# Altium PCB ayx-32-40.PCBDOC
Units mil, origin at the board's own origin, x right, y up, seen from the top; angles counter-clockwise.
Board outline 2086.61 x 728.35 mil, 2 copper layers (Top Layer, Top, Bottom Layer, Bottom); 34 components, 40 nets, 178 pads, 47 vias.
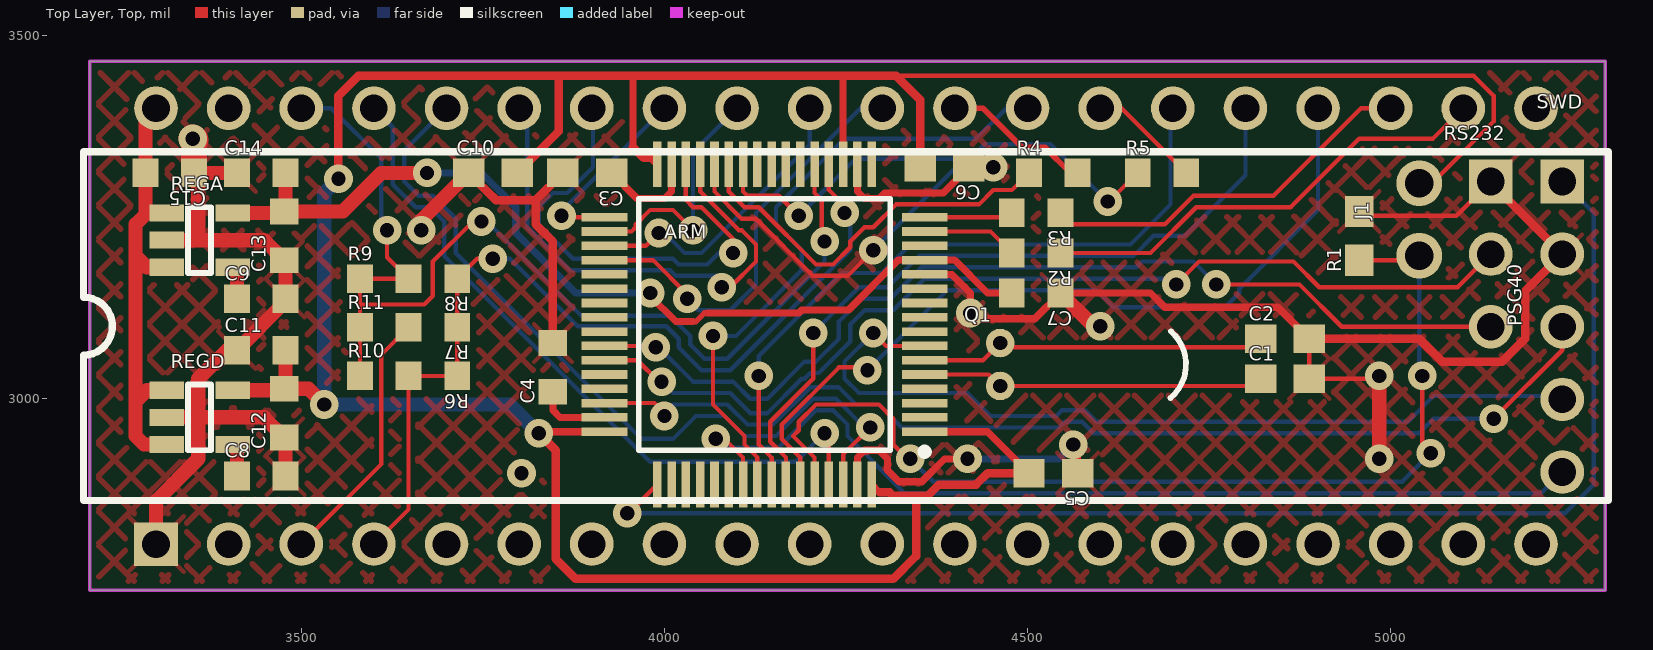
[diagram p0: Top Layer, Top view]
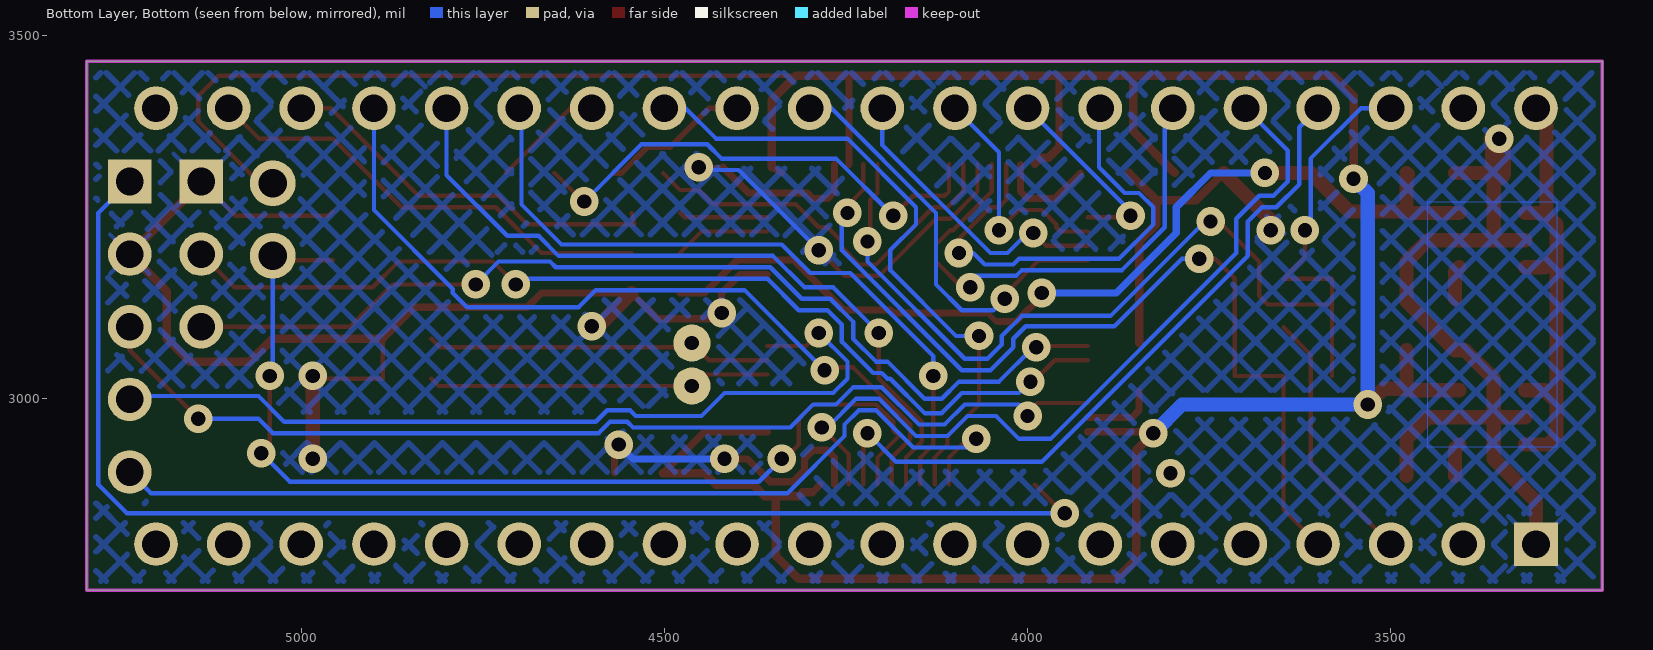
[diagram p1: Bottom Layer, Bottom view, seen from below]

## Layer stack, top to bottom
Top Layer, Top: signal copper 1.4
Dielectric: dielectric 12.6, FR-4, Dk 4.8
Bottom Layer, Bottom: signal copper 1.4

## Board outline
5295.28,3464.57 3208.66,3464.57 3208.66,2736.22 5295.28,2736.22

## Design rules (kind name [scope] priority, off if disabled: settings)
Clearance "Clearance_Top Layer, Top_PadToPad" [ExistsOnLayer('Top Layer, Top') And IsPad vs ExistsOnLayer('Top Layer, Top') And IsPad] p1: gap=6.3
Clearance "Clearance_Top Layer, Top_PadToLine" [ExistsOnLayer('Top Layer, Top') And IsPad vs ExistsOnLayer('Top Layer, Top') And IsWire] p2: gap=8.27
Clearance "Clearance_Top Layer, Top_LineToLine" [ExistsOnLayer('Top Layer, Top') And IsWire vs ExistsOnLayer('Top Layer, Top') And IsWire] p3: gap=6.3
Clearance "Clearance_Top Layer, Top_ViaToPad" [ExistsOnLayer('Top Layer, Top') And IsVia vs ExistsOnLayer('Top Layer, Top') And IsPad] p4: gap=8.27
Clearance "Clearance_Top Layer, Top_ViaToLine" [ExistsOnLayer('Top Layer, Top') And IsVia vs ExistsOnLayer('Top Layer, Top') And IsWire] p5: gap=6.3
Clearance "Clearance_Top Layer, Top_ViaToVia" [ExistsOnLayer('Top Layer, Top') And IsVia vs ExistsOnLayer('Top Layer, Top') And IsVia] p6: gap=6.3
Clearance "Clearance_Bottom Layer, Bottom_PadToPad" [ExistsOnLayer('Bottom Layer, Bottom') And IsPad vs ExistsOnLayer('Bottom Layer, Bottom') And IsPad] p7: gap=6.3
Clearance "Clearance_Bottom Layer, Bottom_PadToLine" [ExistsOnLayer('Bottom Layer, Bottom') And IsPad vs ExistsOnLayer('Bottom Layer, Bottom') And IsWire] p8: gap=8.27
Clearance "Clearance_Bottom Layer, Bottom_LineToLine" [ExistsOnLayer('Bottom Layer, Bottom') And IsWire vs ExistsOnLayer('Bottom Layer, Bottom') And IsWire] p9: gap=6.3
Clearance "Clearance_Bottom Layer, Bottom_ViaToPad" [ExistsOnLayer('Bottom Layer, Bottom') And IsVia vs ExistsOnLayer('Bottom Layer, Bottom') And IsPad] p10: gap=8.27
Clearance "Clearance_Bottom Layer, Bottom_ViaToLine" [ExistsOnLayer('Bottom Layer, Bottom') And IsVia vs ExistsOnLayer('Bottom Layer, Bottom') And IsWire] p11: gap=6.3
Clearance "Clearance_Bottom Layer, Bottom_ViaToVia" [ExistsOnLayer('Bottom Layer, Bottom') And IsVia vs ExistsOnLayer('Bottom Layer, Bottom') And IsVia] p12: gap=6.3
Clearance Clearance_Design_HoleToHole [(IsVia Or IsThruPin) vs (IsVia Or IsThruPin)] p13: gap=13
Clearance [All] p14: gap=6.3
PlaneClearance [All] p1: clearance=10
PolygonConnect PolygonConnect_4 [IsPolygon And InNet('GND') And OnLayer('Bottom Layer, Bottom') vs IsVia] p1: connectstyle=Direct reliefconductorwidth=15 reliefentries=4 polygonreliefangle="90 Angle"
PolygonConnect PolygonConnect_3 [IsPolygon And InNet('GND') And OnLayer('Bottom Layer, Bottom') vs IsPad] p2: connectstyle=Relief reliefconductorwidth=5.91 reliefentries=4 polygonreliefangle="45 Angle"
PolygonConnect PolygonConnect_2 [IsPolygon And InNet('GND') And OnLayer('Top Layer, Top') vs IsVia] p3: connectstyle=Direct reliefconductorwidth=15 reliefentries=4 polygonreliefangle="90 Angle"
PolygonConnect PolygonConnect_1 [IsPolygon And InNet('GND') And OnLayer('Top Layer, Top') vs IsPad] p4: connectstyle=Relief reliefconductorwidth=5.91 reliefentries=4 polygonreliefangle="45 Angle"
PolygonConnect [All] p5: connectstyle=Relief reliefconductorwidth=10 reliefentries=4 polygonreliefangle="90 Angle"
RoutingVias [All] p1: holewidth=28 width=50 viastyle="Through Hole" minholewidth=28 minwidth=50 maxholewidth=28 maxwidth=50
SilkscreenOverComponentPads [All] p1: minsilkscreentomaskgap=10
SolderMaskExpansion [All] p1: expansion=4
Width [All] p1: maxlimit=10 minlimit=10 preferedwidth=10
26 further rules are at their usual default settings.

## Components (designator, comment, footprint, x,y, rotation, side; value= is the part's Value field where it differs from the comment)
ARM "" LQFP-10X10-64 4137.8,3102.36 r180 top
C1 "10p" SMD-1608-0603#1 4854.33,3027.56 r0 top
C2 "10p" SMD-1608-0603#1 4854.33,3082.68 r0 top
C3 "2u2" SMD-1608-0603#1 3893.7,3311.02 r180 top
C4 "2u2" SMD-1608-0603#2 3846.46,3043.31 r90 top
C5 "10n" SMD-1608-0603#1 4535.43,2897.64 r180 top
C6 "u1" SMD-1608-0603#1 4385.83,3318.9 r180 top
C7 "10n" SMD-1608-0603#2 4511.81,3145.67 r180 top
C8 "10n" SMD-1608-0603#2 3444.88,2893.7 r0 top
C9 "10n" SMD-1608-0603#2 3444.88,3137.8 r0 top
C10 "u1" SMD-1608-0603#1 3763.78,3311.02 r0 top
C11 "10u" SMD-1608-0603#2 3444.88,3066.93 r0 top
C12 "u1" SMD-1608-0603#2 3476.38,2980.32 r90 top
C13 "u1" SMD-1608-0603#2 3476.38,3224.41 r90 top
C14 "10u" SMD-1608-0603#2 3444.88,3311.02 r0 top
C15 "10u" SMD-1608-0603#2 3318.9,3311.02 r180 top
J1 "" JUMPER_JUMPER(Primary) 5039.37,3196.85 r90 top
PSG40 "" DIP40 3300,2800 r90 top
Q1 "16MHz" WATCH-XTAL_CRYSTAL-WATCH(Primary) 4460.63,3047.24 r0 top
R1 "4k7" SMD-1608-0603#1 4956.69,3224.41 r90 top
R2 "510" SMD-1608-0603#2 4511.81,3200.79 r180 top
R3 "510" SMD-1608-0603#2 4511.81,3255.91 r180 top
R4 "510" SMD-1608-0603#2 4535.43,3311.02 r0 top
R5 "510" SMD-1608-0603#2 4685.04,3311.02 r0 top
R6 "0" SMD-1608-0603#2 3681.1,3031.5 r180 top
R7 "0" SMD-1608-0603#2 3681.1,3098.43 r180 top
R8 "0" SMD-1608-0603#2 3681.1,3165.35 r180 top
R9 "0" SMD-1608-0603#2 3614.17,3165.35 r0 top
R10 "0" SMD-1608-0603#2 3614.17,3031.5 r0 top
R11 "0" SMD-1608-0603#2 3614.17,3098.43 r0 top
REGA "3.3V" SOT23-5 3314.96,3255.91 r0 top
REGD "3.3V" SOT23-5 3314.96,3011.81 r0 top
RS232 "" DIP-HEAD-3 5137.8,3299.21 r0 top
SWD "" DIP-HEAD-5 5236.22,3299.21 r0 top

## Footprints (in the part's own frame and the unit in brackets; to place one, negate y for a bottom-side part, rotate by r counter-clockwise, add the part's x,y. Pads: shape width x height; smd on the part's side, far side on the other; paste and mask are expansions set on the pad)
DIP40 [mil]
  rect 60x60 hole 38: 1(0,0)
  round 60 hole 38: 2(0,-100) 3(0,-200) 4(0,-300) 5(0,-400) 6(0,-500) 7(0,-600) 8(0,-700) 9(0,-800) 10(0,-900) 11(0,-1000) 12(0,-1100) 13(0,-1200) 14(0,-1300) 15(0,-1400) 16(0,-1500) 17(0,-1600) 18(0,-1700) 19(0,-1800) 20(0,-1900) 21(600,-1900) 22(600,-1800) 23(600,-1700) 24(600,-1600) 25(600,-1500) 26(600,-1400) 27(600,-1300) 28(600,-1200) 29(600,-1100) 30(600,-1000) 31(600,-900) 32(600,-800) 33(600,-700) 34(600,-600) 35(600,-500) 36(600,-400) 37(600,-300) 38(600,-200) 39(600,-100) 40(600,0)
  silkscreen extent 60,-2000 540,100
DIP-HEAD-3 [mil]
  rect 60x60 hole 38: 1(0,0)
  round 60 hole 38: 2(0,-100) 3(0,-200)
DIP-HEAD-5 [mil]
  rect 60x60 hole 38: 1(0,0)
  round 60 hole 38: 2(0,-100) 3(0,-200) 4(0,-300) 5(0,-400)
JUMPER_JUMPER(Primary) [mm]
  round 1.6 hole 1: 0(0,0) 1(2.54,0)
LQFP-10X10-64 [mm]
  rect 1.6x0.3 smd: 1(-5.6,3.75) 2(-5.6,3.25) 3(-5.6,2.75) 4(-5.6,2.25) 5(-5.6,1.75) 6(-5.6,1.25) 7(-5.6,0.75) 8(-5.6,0.25) 9(-5.6,-0.25) 10(-5.6,-0.75) 11(-5.6,-1.25) 12(-5.6,-1.75) 13(-5.6,-2.25) 14(-5.6,-2.75) 15(-5.6,-3.25) 16(-5.6,-3.75) 33(5.6,-3.75) 34(5.6,-3.25) 35(5.6,-2.75) 36(5.6,-2.25) 37(5.6,-1.75) 38(5.6,-1.25) 39(5.6,-0.75) 40(5.6,-0.25) 41(5.6,0.25) 42(5.6,0.75) 43(5.6,1.25) 44(5.6,1.75) 45(5.6,2.25) 46(5.6,2.75) 47(5.6,3.25) 48(5.6,3.75)
  rect 0.3x1.6 smd: 17(-3.75,-5.6) 18(-3.25,-5.6) 19(-2.75,-5.6) 20(-2.25,-5.6) 21(-1.75,-5.6) 22(-1.25,-5.6) 23(-0.75,-5.6) 24(-0.25,-5.6) 25(0.25,-5.6) 26(0.75,-5.6) 27(1.25,-5.6) 28(1.75,-5.6) 29(2.25,-5.6) 30(2.75,-5.6) 31(3.25,-5.6) 32(3.75,-5.6) 49(3.75,5.6) 50(3.25,5.6) 51(2.75,5.6) 52(2.25,5.6) 53(1.75,5.6) 54(1.25,5.6) 55(0.75,5.6) 56(0.25,5.6) 57(-0.25,5.6) 58(-0.75,5.6) 59(-1.25,5.6) 60(-1.75,5.6) 61(-2.25,5.6) 62(-2.75,5.6) 63(-3.25,5.6) 64(-3.75,5.6)
  silkscreen extent -5.72,-4.4 4.4,4.57
SMD-1608-0603#1 [mm]
  rect 1.1x1 smd: 1(-0.85,0) 2(0.85,0)
SMD-1608-0603#2 [mm]
  rect 0.9x1 smd: 1(-0.85,0) 2(0.85,0)
SOT23-5 [mm]
  rect 1.2x0.6 smd: 1(0,0) 2(0,-0.95) 3(0,-1.9) 4(2.3,-1.9) 5(2.3,0)
  silkscreen extent 0.74,-2.1 1.54,0.2
WATCH-XTAL_CRYSTAL-WATCH(Primary) [mm]
  round 1 / inner round 1.3 / far side round 1.3 hole 0.5: A(0.04,0.75) B(0.04,-0.75)
  silkscreen extent 6,-1.17 6.54,1.16

## Part data
J1: "Program"
Q1: "Crystal"

## Via types
v1: diameter 39.37, hole 19.68, Top Layer, Top to Bottom Layer, Bottom, 47 vias

## Nets (pads, with @x,y where several pads share a name; then routed paths per layer and width w, separated by ;. In a path a pad name is that pad's centre, name@x,y a point inside that pad or via, vN(x,y) a via of type N, cw(c..) or ccw(c..) an arc to the next point about the centre after c; other vN are vias at no path point)
AU_A: ARM.20 PSG40.4 R6.1 R6.2 R7.1 R8.1 R10.2 | length 1274.1
  Top Layer, Top w5.91: PSG40.4 3647.64,2847.64 R10.2 R6.1 R7.1 R8.1 3742.13,3192.91 v1(3763.78,3192.91) ; ARM.20 4226.38,3287.4 4248.03,3265.75 v1(4248.03,3255.91)
  Bottom Layer, Bottom w5.91: v1(3763.78,3192.91) 3787.4,3192.91 3880.51,3099.8 4002.56,3099.8 4019.68,3082.68 4019.68,3070.87 4051.18,3039.37 4090.55,3039.37 4255.91,3204.72 4255.91,3248.03 v1(4248.03,3255.91)
AU_B: PSG40.3 R7.2 R11.2 | length 359.6
  Top Layer, Top w5.91: PSG40.3 3610.24,2910.24 3610.24,3061.02 R11.2
AU_C: ARM.21 PSG40.38 R8.2 R9.1 R9.2 R10.1 R11.1 | length 1515.5
  Top Layer, Top w5.91: R10.1 R11.1 3580.71,3129.92 ; v1(3618.11,3232.28) 3618.11,3194.88 R9.2 R9.1 3580.71,3129.92 ; v1(3748.03,3244.09) 3736.22,3244.09 3681.1,3188.98 3681.1,3141.73 3669.29,3129.92 3580.71,3129.92 ; ARM.21 4206.69,3283.46 4216.54,3273.62 4216.54,3220.47 v1(4220.47,3216.54)
  Bottom Layer, Bottom w5.91: PSG40.38 3540.94,3400 3610.24,3330.71 3610.24,3240.16 v1(3618.11,3232.28) ; v1(3748.03,3244.09) 3755.91,3244.09 3885.83,3114.17 4007.87,3114.17 4035.43,3086.61 4035.43,3074.8 4055.12,3055.12 4086.61,3055.12 4220.47,3188.98 v1(4220.47,3216.54)
AY_A8: ARM.58 PSG40.25 | length 1031.2
  Top Layer, Top w5.91: ARM.58 4167.32,2919.29 4145.67,2940.94 4145.67,2968.5 4204.72,3027.56 v1(4204.72,3090.55) ; PSG40.25 4809.45,3400 PSG40.25@4811.02,3401.57
  Bottom Layer, Bottom w5.91: v1(4204.72,3090.55) 4267.72,3153.54 4307.09,3153.54 4350.39,3196.85 4645.67,3196.85 4673.23,3224.41 4716.54,3224.41 4800,3307.87 PSG40.25
AY_BC1: PSG40.29 R4.2 | length 206.5
  Top Layer, Top w5.91: PSG40.29@4400,3399.21 PSG40.29
  Top Layer, Top w7.87: PSG40.29 4438.58,3400 4492.13,3346.46 4523.62,3346.46 4559.06,3311.02 R4.2
AY_BC2: ARM.56 PSG40.28 | length 893.7
  Top Layer, Top w5.91: v1(4066.93,3086.61) 4066.93,2992.13 4110.24,2948.82 4110.24,2937.01 4127.95,2919.29 ARM.56
  Bottom Layer, Bottom w5.91: v1(4066.93,3086.61) 4098.43,3086.61 4188.98,3177.17 4188.98,3204.72 4153.54,3240.16 4153.54,3263.78 4248.03,3358.27 4429.13,3358.27 4470.87,3400 PSG40.28
AY_BDIR: PSG40.27 R5.2 | length 155.4
  Top Layer, Top w5.91: PSG40.27 4629.53,3400 R5.2
AY_CLK: PSG40.22 R2.1 | length 637.2
  Top Layer, Top w5.91: R2.1 4669.29,3200.79 4732.28,3263.78 4862.2,3263.78 4956.69,3358.27 5058.27,3358.27 PSG40.22
GND: ARM.12 ARM.18 ARM.28 ARM.63 C1.2 C2.2 C3.2 C4.2 C5.1 C6.1 C7.1 C8.2 C9.2 C10.1 C11.1 C12.1 C13.1 C14.1 C15.1 PSG40.1 R1.2 REGA.2 REGD.2 RS232.1 SWD.2 | length 4533
  Top Layer, Top w5.91: ARM.28 4068.9,3285.43 4106.3,3248.03 4125.98,3248.03 4204.72,3169.29 4251.97,3169.29 v1(4287.4,3204.72) ; C6.1 v1(4452.76,3318.9) ; v1@4589.76,3110.24 v1(4600,3100) ; C2.2 C1.2 4980.31,3027.56 v1(4984.25,3031.5) ; R1.2 4962.6,3251.97 5090.55,3251.97 RS232.1
  Top Layer, Top w9.84: ARM.63 4265.75,2919.29 4275.59,2929.13 4295.28,2929.13 4307.09,2917.32 4307.09,2901.57 4322.83,2885.83 4354.33,2885.83 4385.83,2917.32 v1(4417.32,2917.32) ; ARM.18 4265.75,3285.43 4275.59,3275.59 4295.28,3275.59 4303.15,3283.46 4383.86,3283.46 C6.1 ; ARM.12 4395.67,3171.26 4421.26,3145.67 v1(4421.26,3118.11) 4429.13,3110.24 4509.84,3110.24 C7.1 4669.29,3145.67 4688.98,3125.98 4844.49,3125.98 C2.2 ; v1(4562.99,2937.01) 4568.9,2931.1 C5.1
  Top Layer, Top w11.81: C10.1 3767.72,3273.62 3822.83,3273.62 ; C4.2 3846.46,3216.54 3822.83,3240.16 3822.83,3273.62 ; C3.2 3822.83,3273.62 ; C2.2 5039.37,3082.68 5070.87,3051.18 5153.54,3051.18 5185.04,3082.68 5185.04,3148.03 SWD.2 5137.8,3297.64 RS232.1
  Top Layer, Top w19.68: PSG40.1 3300,2859.06 3358.27,2917.32 3358.27,2970.47 ; REGD.2 3354.33,2974.41 ; REGA.2 3358.27,3218.5 ; C14.1 C15.1 3358.27,3305.12 3358.27,3218.5 ; C8.2 3478.35,2944.88 C12.1 3448.82,2974.41 3358.27,2974.41 ; v1(3665.35,3232.28) 3665.35,3246.06 C10.1 ; C7.1 4590.94,3100 v1(4600,3100) ; v1(4984.25,2917.32) v1(4984.25,3031.5) ; 3354.33,2974.41 3358.27,2974.41 ; 3354.33,2974.41 3358.27,2970.47 ; 3358.27,2970.47 3358.27,2974.41 ; 3358.27,2974.41 3358.27,3027.56 3397.64,3066.93 C11.1 3478.35,3133.86 C9.2 3478.35,3188.98 C13.1 3448.82,3218.5 3358.27,3218.5
  Top Layer, Top w35.43: C15.1 v1@3352.36,3356.3
  Top Layer, Top w39.37: v1(3350.39,3358.27) v1@3352.36,3356.3
  Bottom Layer, Bottom w5.91: v1(4287.4,3204.72) 4397.64,3314.96 4448.82,3314.96 v1(4452.76,3318.9)
  Bottom Layer, Bottom w9.84: v1(4417.32,2917.32) 4543.31,2917.32 v1(4562.99,2937.01)
NET00000: ARM.31 C3.1 | length 138.8
  Top Layer, Top w9.84: C3.1 3962.6,3275.59 4000,3275.59 4009.84,3285.43 ARM.31
NET00002: ARM.47 C4.1 | length 100.5
  Top Layer, Top w9.84: C4.1 3846.46,2984.25 3856.3,2974.41 ARM.47
NET00003: ARM.60 J1.0 R1.1 | length 1448.6
  Top Layer, Top w5.91: ARM.60 4206.69,2919.29 4177.17,2948.82 4185.04,2956.69 4185.04,2968.5 4208.66,2992.13 4295.28,2992.13 4314.96,2972.44 4314.96,2937.01 4334.65,2917.32 v1(4338.58,2917.32) ; R1.1 5033.46,3190.94 J1.0 J1.0@5055.12,3181.1 ; v1(5043.31,3031.5) 5043.31,2937.01 v1(5055.12,2925.2)
  Bottom Layer, Bottom w5.91: v1(4338.58,2917.32) 4370.08,2885.83 5015.75,2885.83 v1(5055.12,2925.2) ; J1.0 5039.37,3035.43 v1(5043.31,3031.5)
NET00004: ARM.6 C2.1 Q1.A | length 479.7
  Top Layer, Top w5.91: ARM.6 4438.58,3053.15 Q1.A 4468.11,3070.87 4809.06,3070.87 C2.1
NET00005: ARM.5 C1.1 Q1.B | length 473.2
  Top Layer, Top w5.91: ARM.5 4446.46,3033.46 Q1.B 4811.02,3017.72 C1.1
NET00006: ARM.15 R2.2 | length 132.3
  Top Layer, Top w5.91: ARM.15 4448.82,3230.32 R2.2
NET00007: ARM.16 R3.2 | length 122.5
  Top Layer, Top w5.91: ARM.16 4472.44,3250 R3.2
NET00008: ARM.27 R4.1 | length 549.2
  Top Layer, Top w5.91: ARM.27 4088.58,3285.43 4110.24,3263.78 4129.92,3263.78 4208.66,3185.04 4232.28,3185.04 4255.91,3208.66 4255.91,3216.54 4275.59,3236.22 4287.4,3236.22 4318.9,3267.72 4433.07,3267.72 4452.76,3287.4 4478.35,3287.4 R4.1
NET00009: ARM.26 R5.1 | length 684.3
  Top Layer, Top w5.91: ARM.26 4108.27,3285.43 4114.17,3279.53 4157.48,3279.53 v1(4185.04,3251.97) ; v1(4610.24,3271.65) 4612.2,3271.65 R5.1
  Bottom Layer, Bottom w5.91: v1(4185.04,3251.97) 4263.78,3330.71 4421.26,3330.71 4440.94,3350.39 4531.5,3350.39 v1(4610.24,3271.65)
NET00010: C8.1 REGD.4 | length 45.8
  Top Layer, Top w19.68: REGD.4 3411.42,2931.1 C8.1
NET00011: C9.1 REGA.4 | length 45.8
  Top Layer, Top w19.68: REGA.4 3411.42,3175.2 C9.1
SWCLK: ARM.49 SWD.1 | length 1839.9
  Top Layer, Top w5.91: v1(3948.82,2842.52) 3950.79,2842.52 ARM.49
  Bottom Layer, Bottom w5.91: v1(3948.82,2842.52) 5240.16,2842.52 5279.53,2881.89 5279.53,3255.91 SWD.1
SWDIO: ARM.46 SWD.3 | length 1482.2
  Top Layer, Top w5.91: ARM.46 3986.22,2994.09 4000,2980.32 v1(4000,2976.38) ; v1(5141.73,2972.44) 5236.22,3066.93 SWD.3
  Bottom Layer, Bottom w5.91: v1(4000,2976.38) 4000,2980.32 4011.81,2992.13 4086.61,2992.13 4114.17,2964.57 4149.61,2964.57 4200.79,3015.75 4240.16,3015.75 4263.78,2992.13 4295.28,2992.13 4326.77,2960.63 4543.31,2960.63 4551.18,2968.5 4574.8,2968.5 4590.55,2952.76 5039.37,2952.76 5059.06,2972.44 v1(5141.73,2972.44)
SWO: ARM.55 SWD.5 | length 1349.4
  Top Layer, Top w5.91: v1(4070.87,2944.88) 4082.68,2944.88 4108.27,2919.29 ARM.55
  Bottom Layer, Bottom w5.91: v1@4066.93,2944.88 v1(4070.87,2944.88) 4082.68,2933.07 4157.48,2933.07 4208.66,2984.25 4232.28,2984.25 4251.97,2964.57 4251.97,2948.82 4330.71,2870.08 5207.09,2870.08 SWD.5
USART_RX: ARM.43 RS232.2 | length 1419.1
  Top Layer, Top w5.91: ARM.43 3962.6,3053.15 3992.13,3023.62 v1(3996.06,3023.62) ; v1@4700.79,3141.73 v1(4704.72,3157.48) ; v1@4716.54,3157.48 v1(4704.72,3157.48) ; RS232.2 5092.13,3153.54 4901.57,3153.54 4866.14,3188.98 4736.22,3188.98 v1(4704.72,3157.48)
  Bottom Layer, Bottom w5.91: v1(3996.06,3023.62) 4011.81,3007.87 4090.55,3007.87 4118.11,2980.32 4141.73,2980.32 4188.98,3027.56 4192.91,3027.56 4200.79,3035.43 4212.6,3035.43 4255.91,3078.74 4255.91,3102.36 4275.59,3122.05 4314.96,3122.05 4358.27,3165.35 4696.85,3165.35 v1(4704.72,3157.48)
USART_TX: ARM.42 RS232.3 | length 1379.9
  Top Layer, Top w5.91: ARM.42 3986.22,3072.83 v1(3988.19,3070.87) ; v1(4759.84,3157.48) 4874.41,3157.48 4932.68,3099.21 RS232.3
  Bottom Layer, Bottom w5.91: v1(3988.19,3070.87) 3992.13,3070.87 4039.37,3023.62 4094.49,3023.62 4118.11,3000 4141.73,3000 4192.91,3051.18 4208.66,3051.18 4240.16,3082.68 4240.16,3106.3 4271.65,3137.8 4311.02,3137.8 4354.33,3181.1 4649.61,3181.1 4657.48,3188.98 4728.35,3188.98 v1(4759.84,3157.48)
VDD5: C15.2 PSG40.40 REGA.1 REGA.3 REGD.1 REGD.3 | length 640
  Top Layer, Top w19.68: PSG40.40 3285.43,3385.43 C15.2 3285.43,3257.87 3287.4,3255.91 ; REGD.3 3283.46,2937.01 3271.65,2948.82 3271.65,2996.06 ; REGD.1 3287.4,3011.81 3271.65,2996.06 ; REGA.3 3287.4,3181.1 3271.65,3196.85 ; REGA.1 3287.4,3255.91 ; 3271.65,2996.06 3271.65,3196.85 ; 3271.65,3196.85 3271.65,3240.16 3287.4,3255.91
VDD33: ARM.1 ARM.19 ARM.32 ARM.48 ARM.64 C5.2 C6.2 C10.2 C11.2 C12.2 J1.1 REGD.5 | length 4595.6
  Top Layer, Top w5.91: 4303.15,3444.88 4318.9,3444.88 5114.17,3444.88 5141.73,3417.32 5141.73,3381.89 5056.69,3296.85 J1.1
  Top Layer, Top w9.84: v1(3826.77,2952.76) 3828.74,2954.72 ARM.48 ; 3956.69,3346.46 3956.69,3444.88 ; 3981.3,3331.69 ARM.32 ; 4244.09,3444.88 4246.06,3442.91 ARM.19 ; ARM.64 4296.26,2871.06 ; C6.2@4338.58,3311.02 C6.2 ; ARM.1 4444.88,2954.72 C5.2
  Top Layer, Top w11.81: v1(3551.18,3303.15) 3551.18,3417.32 3578.74,3444.88 3854.33,3444.88 ; C10.2 3854.33,3368.11 3854.33,3444.88 ; v1(3826.77,2952.76) 3850.39,2929.13 3850.39,2779.53 3877.95,2751.97 4314.96,2751.97 4346.46,2783.46 4346.46,2866.14 ; 3956.69,3346.46 3971.46,3331.69 3981.3,3331.69 ; 4296.26,2871.06 4310.04,2871.06 4314.96,2866.14 4346.46,2866.14 ; C6.2 4352.36,3411.42 4318.9,3444.88 4303.15,3444.88 4244.09,3444.88 3956.69,3444.88 3854.33,3444.88 ; C5.2 4444.88,2897.64 4429.13,2881.89 4377.95,2881.89 4362.2,2866.14 4346.46,2866.14
  Top Layer, Top w19.68: REGD.5 3474.41,3011.81 C12.2 ; C11.2 3478.35,3015.75 C12.2 ; v1(3531.5,2992.13) 3509.84,3013.78 C12.2
  Bottom Layer, Bottom w19.68: v1(3551.18,3303.15) 3531.5,3283.46 v1(3531.5,2992.13) 3787.4,2992.13 v1(3826.77,2952.76)
VDDA33: ARM.13 C7.2 C13.2 C14.2 REGA.5 | length 1314.1
  Top Layer, Top w7.87: 4039.37,3106.3 4043.31,3106.3 4055.12,3118.11 4059.06,3118.11
  Top Layer, Top w9.84: v1(3980.32,3145.67) 3980.32,3141.73 4015.75,3106.3 4039.37,3106.3 ; 4059.06,3118.11 4185.04,3118.11 4188.98,3122.05 4253,3122.05 4321.9,3190.94 ARM.13 4399.61,3190.94 4444.88,3145.67 C7.2
  Top Layer, Top w19.68: REGA.5 3474.41,3255.91 C13.2 ; C14.2@3476.38,3309.06 C14.2 3478.35,3259.84 C13.2 ; v1(3673.23,3311.02) 3610.24,3311.02 3557.09,3257.87 C13.2
  Bottom Layer, Bottom w9.84: v1(3673.23,3311.02) 3748.03,3311.02 3795.28,3263.78 3795.28,3228.35 3877.95,3145.67 v1(3980.32,3145.67)
Z80_D0: ARM.61 PSG40.37 | length 985.5
  Top Layer, Top w5.91: v1(4220.47,2952.76) 4226.38,2946.85 ARM.61
  Bottom Layer, Bottom w5.91: PSG40.37 3625.98,3374.02 3625.98,3295.28 3657.48,3263.78 3677.17,3263.78 3696.85,3244.09 3696.85,3196.85 3980.32,2913.39 4181.1,2913.39 v1(4220.47,2952.76)
Z80_D1: ARM.62 PSG40.36 | length 1097.3
  Top Layer, Top w5.91: ARM.62 4246.06,2923.23 v1(4283.46,2960.63)
  Bottom Layer, Bottom w5.91: PSG40.36 3641.73,3341.73 3641.73,3299.21 3661.42,3279.53 3681.1,3279.53 3712.6,3248.03 3712.6,3200.79 3968.5,2944.88 4011.81,2944.88 4043.31,2976.38 4082.68,2976.38 4110.24,2948.82 4153.54,2948.82 4204.72,3000 4236.22,3000 4275.59,2960.63 v1(4283.46,2960.63)
Z80_D2: ARM.29 PSG40.35 | length 704.8
  Top Layer, Top w5.91: ARM.29 4049.21,3285.43 4102.36,3232.28 4106.3,3232.28 4125.98,3212.6 4125.98,3188.98 4090.55,3153.54 v1(4078.74,3153.54)
  Bottom Layer, Bottom w5.91: PSG40.35 3811.02,3388.98 3811.02,3236.22 3870.08,3177.17 4007.87,3177.17 4015.75,3169.29 4070.87,3169.29 4078.74,3161.42 v1(4078.74,3153.54)
Z80_D3: ARM.30 PSG40.34 | length 656
  Top Layer, Top w5.91: ARM.30 4029.53,3273.62 4039.37,3263.78 4051.18,3263.78 4094.49,3220.47 v1(4094.49,3200.79)
  Bottom Layer, Bottom w5.91: PSG40.34 3901.57,3398.43 3901.57,3318.9 3866.14,3283.46 3846.46,3283.46 3826.77,3263.78 3826.77,3240.16 3874.02,3192.91 4011.81,3192.91 4019.68,3185.04 4059.06,3185.04 4074.8,3200.79 v1(4094.49,3200.79)
Z80_D4: ARM.33 PSG40.33 | length 266.6
  Top Layer, Top w5.91: v1(3858.27,3251.97) 3860.24,3250 ARM.33
  Bottom Layer, Bottom w5.91: v1(3858.27,3251.97) 3858.27,3258.27 PSG40.33
Z80_D5: ARM.34 PSG40.32 | length 340.8
  Top Layer, Top w5.91: ARM.34 3954.72,3230.32 3960.63,3236.22 3960.63,3240.16 3980.32,3259.84 4011.81,3259.84 v1(4039.37,3232.28)
  Bottom Layer, Bottom w5.91: v1(4039.37,3232.28) 4039.37,3339.37 PSG40.32
Z80_D6: ARM.35 PSG40.31 | length 414.3
  Top Layer, Top w5.91: ARM.35 3974.41,3210.63 v1(3992.13,3228.35) ; PSG40.31@4199.21,3400 PSG40.31
  Bottom Layer, Bottom w5.91: v1(3992.13,3228.35) 4000,3228.35 4027.56,3200.79 4051.18,3200.79 4200,3349.61 PSG40.31
Z80_D7: ARM.36 PSG40.30 | length 587.5
  Top Layer, Top w5.91: ARM.36 3984.25,3190.94 4031.5,3143.7 v1(4031.5,3137.8)
  Bottom Layer, Bottom w5.91: v1(4031.5,3137.8) 4047.24,3122.05 4090.55,3122.05 4125.98,3157.48 4125.98,3255.91 4270.08,3400 PSG40.30
~AY_A9: ARM.59 PSG40.24 | length 1120.4
  Top Layer, Top w5.91: ARM.59 4187.01,2919.29 4161.42,2944.88 4161.42,2964.57 4240.16,3043.31 4275.59,3043.31 v1(4279.53,3039.37)
  Bottom Layer, Bottom w5.91: v1(4279.53,3039.37) 4389.76,3149.61 4594.49,3149.61 4618.11,3125.98 4771.65,3125.98 4791.34,3145.67 4791.34,3151.18 4900,3259.84 PSG40.24
~AY_RST: PSG40.23 R3.1 | length 554.5
  Top Layer, Top w5.91: R3.1 4541.34,3240.16 4545.28,3240.16 4688.98,3240.16 4728.35,3279.53 4838.58,3279.53 4959.06,3400 PSG40.23 PSG40.23@5000,3413.39
~AY_SEL: ARM.57 PSG40.26 | length 980.1
  Top Layer, Top w5.91: v1(4129.92,3031.5) 4133.86,3027.56 4133.86,3019.68 4129.92,3015.75 4129.92,2937.01 4147.64,2919.29 ARM.57 ; PSG40.26 4703.15,3400 PSG40.26@4704.72,3401.57
  Bottom Layer, Bottom w5.91: v1(4129.92,3031.5) 4129.92,3059.06 4244.09,3173.23 4299.21,3173.23 4338.58,3212.6 4641.73,3212.6 4696.85,3267.72 4696.85,3396.85 PSG40.26
~RES: ARM.7 SWD.4 | length 1193.3
  Top Layer, Top w5.91: v1(4287.4,3090.55) 4305.12,3072.83 ARM.7
  Bottom Layer, Bottom w5.91: v1(4287.4,3090.55) 4248.03,3051.18 4248.03,3027.56 4267.72,3007.87 4417.32,3007.87 4448.82,2976.38 4539.37,2976.38 4547.24,2984.25 4578.74,2984.25 4594.49,2968.5 5023.62,2968.5 5059.06,3003.94 5231.5,3003.94 SWD.4
pads on no net: ARM.2 ARM.3 ARM.4 ARM.8 ARM.9 ARM.10 ARM.11 ARM.14 ARM.17 ARM.22 ARM.23 ARM.24 ARM.25 ARM.37 ARM.38 ARM.39 ARM.40 ARM.41 ARM.44 ARM.45 ARM.50 ARM.51 ARM.52 ARM.53 ARM.54 PSG40.2 PSG40.5 PSG40.6 PSG40.7 PSG40.8 PSG40.9 PSG40.10 PSG40.11 PSG40.12 PSG40.13 PSG40.14 PSG40.15 PSG40.16 PSG40.17 PSG40.18 PSG40.19 PSG40.20 PSG40.21 PSG40.39
copper on no net: | length 3.9
  Top Layer, Top w19.68: v1@3803.15,2893.7 v1(3803.15,2897.64)

## Polygon pours and split planes (outlines as drawn)
GND on Top Layer, Top (hatched 45Degree grid 32.99 track 7.99, remove dead copper): 3220.47,2748.03 5283.46,2748.03 5283.46,3448.82 3220.47,3448.82
GND on Bottom Layer, Bottom (hatched 45Degree grid 32.99 track 7.99, remove dead copper): 3220.47,3448.82 3220.47,2748.03 5283.46,2748.03 5283.46,3448.82
GND on Bottom Layer, Bottom (solid, remove dead copper): 3271.65,2933.07 3448.82,2933.07 3448.82,3271.65 3271.65,3271.65

## Keep-outs
Keep-Out Layer, Board:
  the board outline again, w5

## Silkscreen, mask and mechanical layers (free items; w line width, h text height)
Bottom Solder, Bot Mask:
  text "AYX-32" at 3340.87,3251.97 h31.25 r90
  text "(c)2017 TSL" at 3409.45,3251.97 h31.25 r90